# Altium PCB PCB.PcbDoc
Units mm, origin at the board's own origin, x right, y up, seen from the top; angles counter-clockwise.
Board outline 33.85 x 18.99 mm, 2 copper layers (Top Layer, Bottom Layer); 33 components, 25 nets, 134 pads, 55 vias.
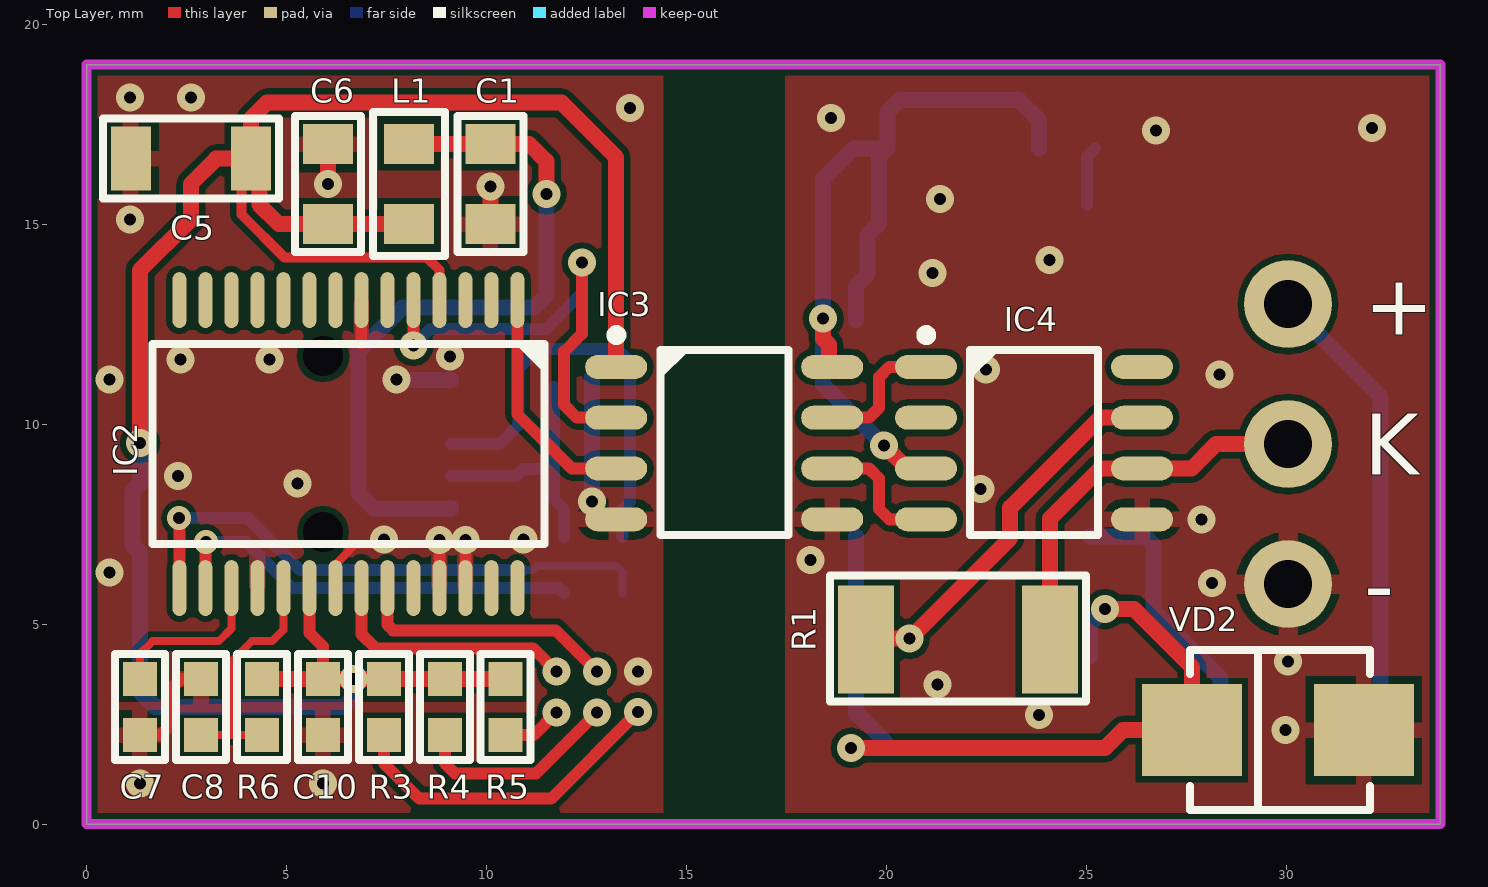
[diagram p0: Top Layer view]
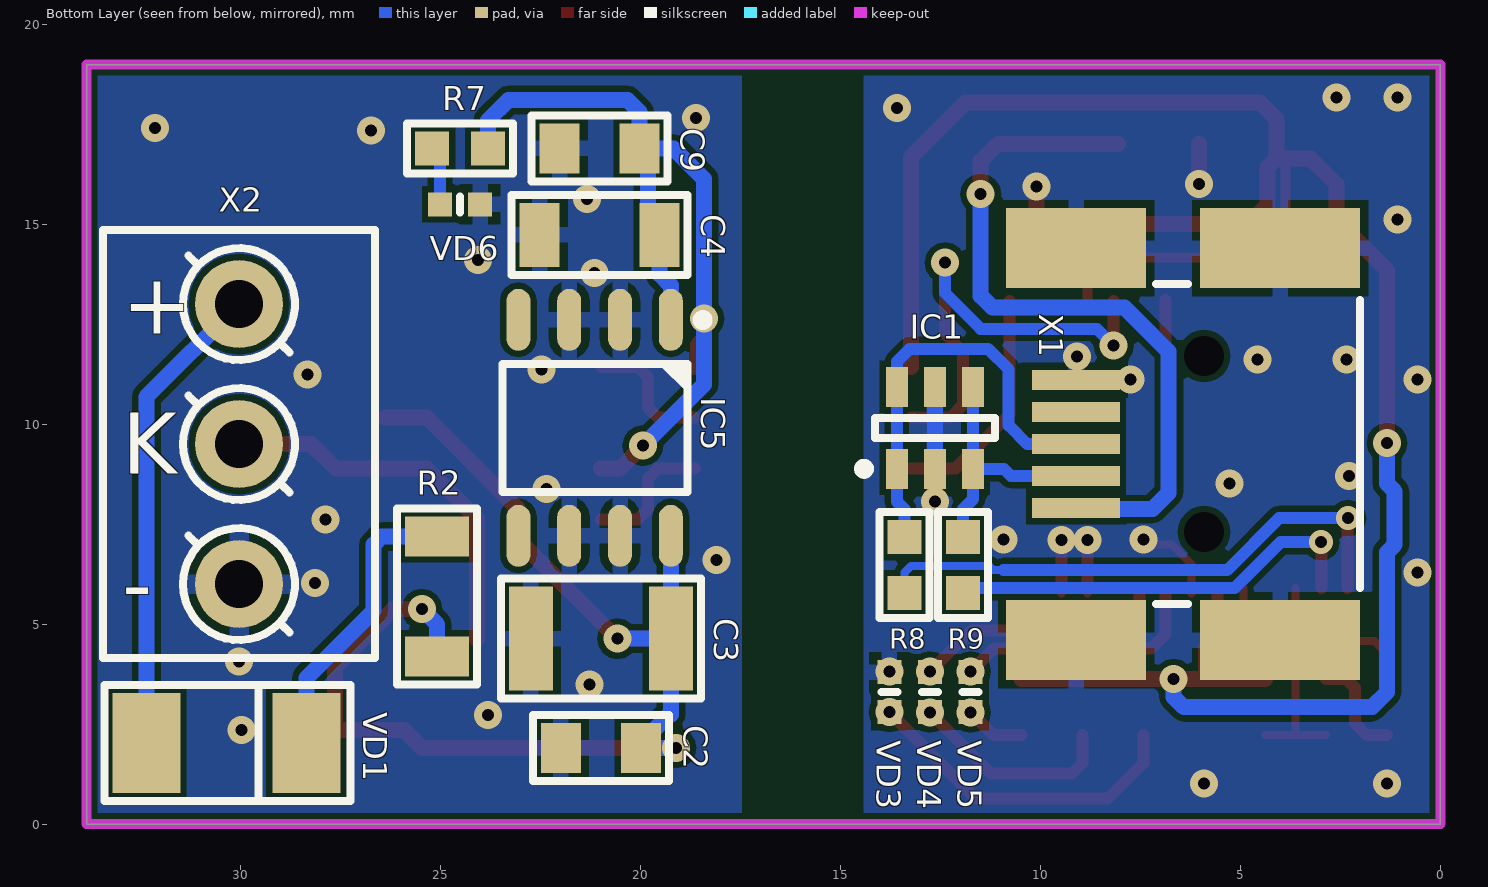
[diagram p1: Bottom Layer view, seen from below]
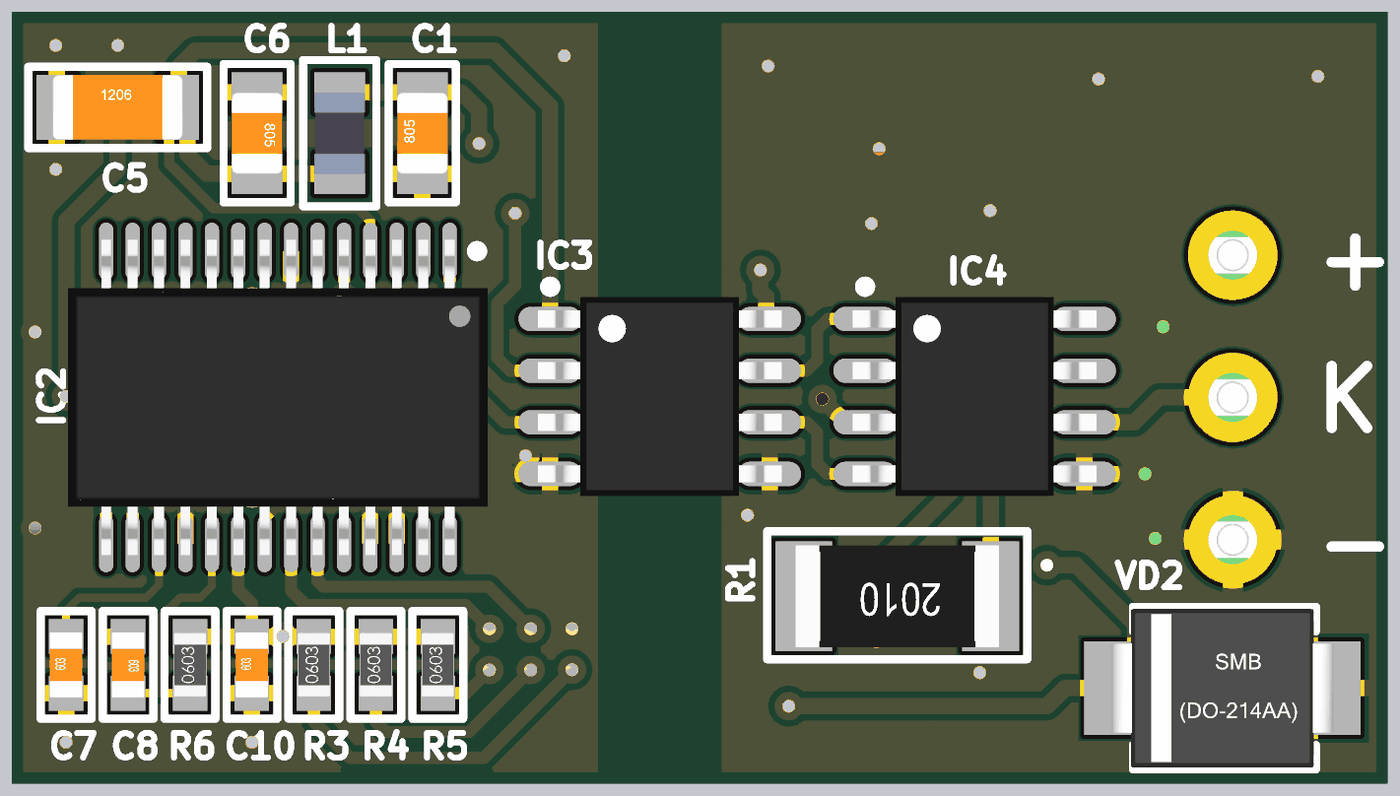
[diagram p2: 3D render of the assembled board from above, using the file's embedded part models]
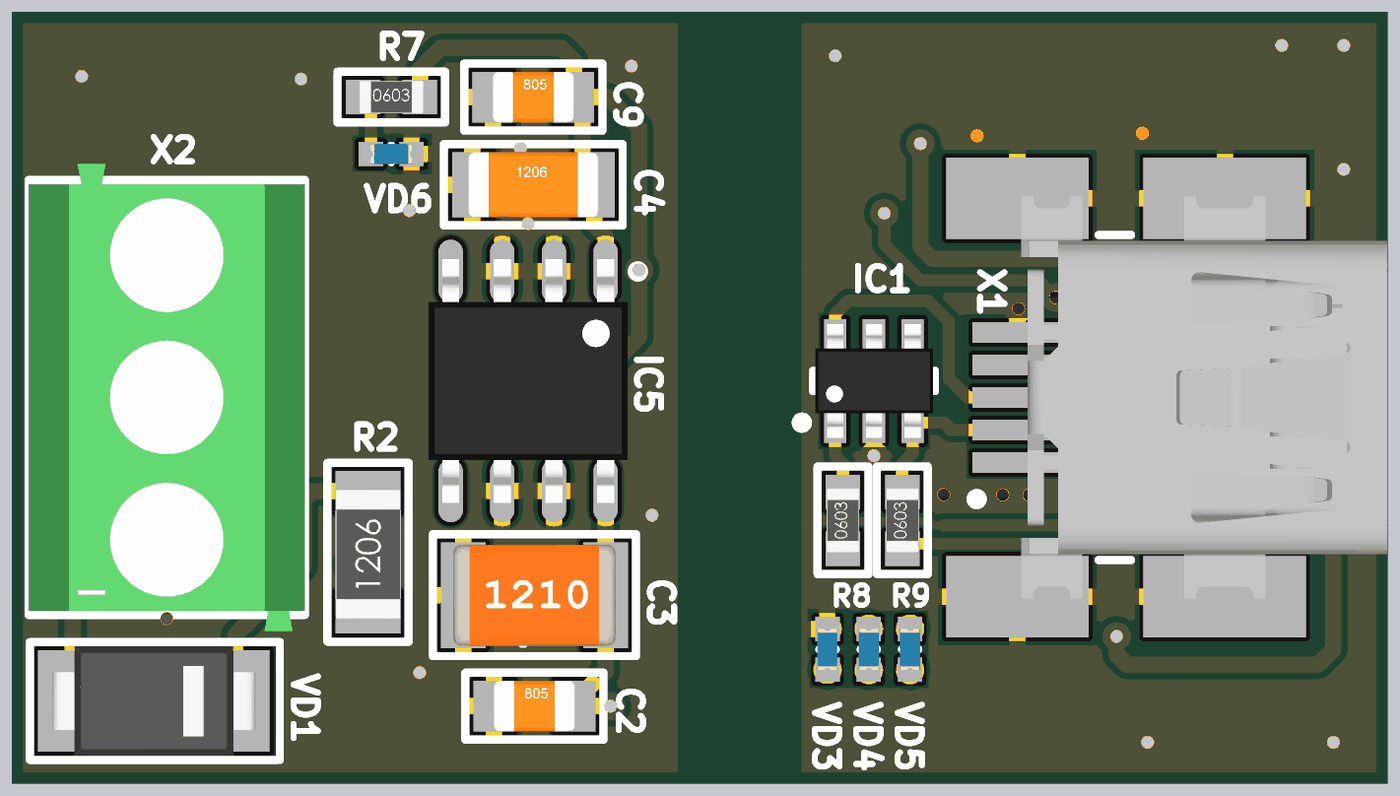
[diagram p3: 3D render of the assembled board from below, using the file's embedded part models]

## Layer stack, top to bottom
Top Solder: solder mask 0.0102, Solder Resist, Dk 3.5
Top Layer: signal copper 0.0356
Dielectric 1: dielectric 0.32, FR-4, Dk 4.8
Bottom Layer: signal copper 0.0356
Bottom Solder: solder mask 0.0102, Solder Resist, Dk 3.5

## Board outline
0,0 33.845,0 33.845,18.986 0,18.986

## Design rules (kind name [scope] priority, off if disabled: settings)
BoardOutlineClearance [All] p1: gap=0.25 ignorepadtopadclearanceinfootprint=FALSE except(0.2: Arc-OutlineEdge Arc-CavityEdge Arc-CutoutEdge Arc-SplitBarrior Arc-SplitContinuation Track-OutlineEdge Track-CavityEdge Track-CutoutEdge Track-SplitBarrior Track-SplitContinuation Region-OutlineEdge Region-CavityEdge Region-CutoutEdge Region-SplitBarrior Region-SplitContinuation Text-OutlineEdge Text-CavityEdge Text-CutoutEdge Text-SplitBarrior Text-SplitContinuation)
Clearance Clearance_1 [InPolygon] p1: gap=0.15 ignorepadtopadclearanceinfootprint=FALSE
Clearance [All] p2: gap=0.15 ignorepadtopadclearanceinfootprint=FALSE
HoleSize [All] p1: absolutevalues=TRUE maxlimit=2.54 minlimit=0.3 maxpercent=80.000 minpercent=20.000
HoleToHoleClearance [All] p1: gap=0.2 allowstackedmicrovias=TRUE
MinimumAnnularRing [All] p1: minimumring=0.2
MinimumSolderMaskSliver [All] p1: minsoldermaskwidth=0.05
PolygonConnect PolygonConnect_1 [IsVia] p1: connectstyle=Direct reliefconductorwidth=0.254 reliefentries=4 polygonreliefangle="90 Angle" airgapwidth=0.254
PolygonConnect [All] p2: thpad.connectstyle=Relief thpad.reliefconductorwidth=0.5 thpad.reliefentries=4 thpad.polygonreliefangle="90 Angle" thpad.airgapwidth=0.2 smdpad.connectstyle=Relief smdpad.reliefconductorwidth=0.4 smdpad.reliefentries=4 smdpad.polygonreliefangle="90 Angle" smdpad.airgapwidth=0.2 via.connectstyle=Relief via.reliefconductorwidth=0.254 via.reliefentries=4 via.polygonreliefangle="45 Angle" via.airgapwidth=0.254
RoutingVias [All] p1: holewidth=0.3 width=0.6 viastyle="Through Hole" minholewidth=0.3 minwidth=0.6 maxholewidth=0.3 maxwidth=0.6
SilkToSilkClearance [All] p1: silktosilkclearance=0.05
SilkToSolderMaskClearance [IsPad] p1: minsilkscreentomaskgap=0.05 clearancetoexposedcopper=TRUE
SolderMaskExpansion [All] p1: expansion=0.102
UnRoutedNet [All] p1: checkbadconnections=TRUE
UnpouredPolygon [All] p1: allowunpoured=TRUE
Width [All] p1: maxlimit=2 minlimit=0.125 preferedwidth=0.15 minimp=50.000000 maximp=50.000000 favimp=50.000000
23 further rules are at their usual default settings.

## Components (designator, comment, footprint, x,y, rotation, side; value= is the part's Value field where it differs from the comment)
C1 "Ceramic capacitor, 0.1μF, X7R, ±10%, 16V, 0805, -55...+125°C" "CAP: 0805" 10.096,16.002 r90 top value=0.1?F
C2 "Ceramic capacitor, 0.1μF, X7R, ±10%, 16V, 0805, -55...+125°C" "CAP: 0805" 20.991,1.905 r180 bottom value=0.1?F
C3 "Ceramic capacitor, 10μF, X7R, ±10%, 50V, 1210, -55...+125°C" "CAP: 1210" 20.991,4.635 r180 bottom value=10?F
C4 "Ceramic capacitor, 4.7μF, X7R, ±10%, 50V, 1206, -55...+125°C" "CAP: 1206" 21.018,14.732 r180 bottom value=4.7?F
C5 "Ceramic capacitor, 4.7μF, X7R, ±10%, 50V, 1206, -55...+125°C" "CAP: 1206" 2.603,16.637 r0 top value=4.7?F
C6 "Ceramic capacitor, 0.1μF, X7R, ±10%, 16V, 0805, -55...+125°C" "CAP: 0805" 6.032,16.002 r270 top value=0.1?F
C7 "Ceramic capacitor, 0.1μF, X7R, ±10%, 16V, 0603, -55...+125°C" "CAP: 0603" 1.333,2.921 r90 top value=0.1?F
C8 "Ceramic capacitor, 0.1μF, X7R, ±10%, 16V, 0603, -55...+125°C" "CAP: 0603" 2.857,2.921 r270 top value=0.1?F
C9 "Ceramic capacitor, 0.1μF, X7R, ±10%, 16V, 0805, -55...+125°C" "CAP: 0805" 21.018,16.891 r180 bottom value=0.1?F
C10 "Ceramic capacitor, 0.1μF, X7R, ±10%, 16V, 0805, -55...+125°C" "CAP: 0603" 5.905,2.921 r90 top value=0.1?F
IC1 "SN65220DBVR" SOT23-6 12.636,9.906 r90 bottom
IC2 "FT232RL" 28-SSOP 6.545,9.5 r270 top locked
IC3 "IC digital isolator, 100Mbps, 3000Vrms, 2.25...5.5V, -55...+125°C, 8-SOIC" 8-SOIC 15.938,9.525 r0 top locked
IC4 "Si9243" 8-SOIC 23.685,9.525 r0 top locked
IC5 "LM2936-5.0" 8-SOIC 21.145,9.906 r270 bottom locked
L1 "Fixed inductor, 47μH, ±20%, 0805, 100mA, -55...+125°C" "IND: 0805" 8.064,16.002 r90 top value=47?H
R1 "Resistor film, 510R, ±5%, 2010, 0.75W, -55...+125°C" "RES: 2010" 21.78,4.611 r180 top locked value=510R
R2 "Resistor film, 10R, ±5%, 1206, 0.25W, -55...+125°C" "RES: 1206" 25.082,5.691 r90 bottom value=10R
R3 "Resistor film, 270R, ±5%, 0603, 0.1W, -55...+125°C" "RES: 0603" 7.429,2.921 r90 top value=270R
R4 "Resistor film, 270R, ±5%, 0603, 0.1W, -55...+125°C" "RES: 0603" 8.954,2.921 r90 top value=270R
R5 "Resistor film, 270R, ±5%, 0603, 0.1W, -55...+125°C" "RES: 0603" 10.477,2.921 r90 top value=270R
R6 "Resistor film, 10K, ±5%, 0603, 0.1W, -55...+125°C" "RES: 0603" 4.381,2.921 r90 top value=10K
R7 "Resistor film, 270R, ±5%, 0603, 0.1W, -55...+125°C" "RES: 0603" 24.511,16.891 r180 bottom value=270R
R8 "Resistor film, 22R, ±5%, 0603, 0.1W, -55...+125°C" "RES: 0603" 13.399,6.477 r90 bottom value=22R
R9 "Resistor film, 22R, ±5%, 0603, 0.1W, -55...+125°C" "RES: 0603" 11.938,6.477 r90 bottom value=22R
VD1 "Single diode, 75V, 150mA, 1V, 4ns, SOD-323, -55...+150°C" "DIODE: SMA" 30.353,2.032 r180 bottom
VD2 "Zener diode, 18V, 500mW, 0.9V, 17Ohm, SOD-123, -55...+150°C" "DIODE: SMB" 29.781,2.349 r180 top locked
VD3 "LED, *, *, *, -55...+150°C" "LED: 0402B" 13.779,3.302 r90 bottom
VD4 "LED, *, *, *, -55...+150°C" "LED: 0402B" 12.763,3.302 r90 bottom
VD5 "LED, *, *, *, -55...+150°C" "LED: 0402B" 11.747,3.302 r90 bottom
VD6 "LED, *, *, *, -55...+150°C" "LED: 0402B" 24.511,15.494 r180 bottom
X1 "USB mini B" "CON: 0675031020" 9.109,9.5 r0 bottom locked
X2 "Terminal connector, 3pin, 3.5mm, 300VAC, 10A" "CON: DG350-3.5-03P" 30.035,9.5 r270 bottom locked

## Footprints (in the part's own frame and the unit in brackets; to place one, negate y for a bottom-side part, rotate by r counter-clockwise, add the part's x,y. Pads: shape width x height; smd on the part's side, far side on the other; paste and mask are expansions set on the pad)
8-SOIC [mm] "pitch 1.27 mm"
  rrect100% 1.55x0.6 smd: 1(-2.7,1.905) 2(-2.7,0.635) 3(-2.7,-0.635) 4(-2.7,-1.905) 5(2.7,-1.905) 6(2.7,-0.635) 7(2.7,0.635) 8(2.7,1.905)
  round 0.7 on Mech1: 28(-2.395,1.8)
  silkscreen extent -2.82,-2.3 1.61,2.82, body extent -3,-2.45 3,2.45, height 1.75
28-SSOP [mm] "pitch 0.65 mm"
  rrect100% 1.4x0.35 smd: 1(-3.6,4.225) 2(-3.6,3.575) 3(-3.6,2.925) 4(-3.6,2.275) 5(-3.6,1.625) 6(-3.6,0.975) 7(-3.6,0.325) 8(-3.6,-0.325) 9(-3.6,-0.975) 10(-3.6,-1.625) 11(-3.6,-2.275) 12(-3.6,-2.925) 13(-3.6,-3.575) 14(-3.6,-4.225) 15(3.6,-4.225) 16(3.6,-3.575) 17(3.6,-2.925) 18(3.6,-2.275) 19(3.6,-1.625) 20(3.6,-0.975) 21(3.6,-0.325) 22(3.6,0.325) 23(3.6,0.975) 24(3.6,1.625) 25(3.6,2.275) 26(3.6,2.925) 27(3.6,3.575) 28(3.6,4.225)
  round 0.5 on Top Overlay: ""(-3.6,4.9)
  round 0.5 on Mech1: ""(-3.4,4.6)
  silkscreen extent -2.5,-4.9 2.5,4.9, body extent -3.88,-5.16 3.88,5.17, height 2.15
"CAP: 0603" [mm]
  rect 0.85x0.85 smd: 1(-0.7,0) 2(0.7,0)
  silkscreen extent -1.33,-0.62 1.33,0.62, body extent -0.8,-0.4 0.8,0.4, height 0.3
"CAP: 0805" [mm]
  rect 1x1.25 smd: 1(-1,0) 2(1,0)
  silkscreen extent -1.7,-0.82 1.7,0.82, body extent -1,-0.62 1,0.63, height 0.78
"CAP: 1206" [mm]
  rect 1x1.6 smd: 1(-1.5,0) 2(1.5,0)
  silkscreen extent -2.2,-1 2.2,1, body extent -1.6,-0.8 1.6,0.8, height 1
"CAP: 1210" [mm]
  rect 1.1x2.6 smd: 1(-1.75,0) 2(1.75,0)
  silkscreen extent -2.5,-1.5 2.5,1.5, body extent -2,-1.24 2,1.24, height 1.7
"CON: 0675031020" [mm]
  rect 4x2 smd: 0(-5.1,-4.9) 0(-5.1,4.9)
  rect 3.5x2 smd: 0(0,-4.9) 0(0,4.9)
  rect 2.2x0.5 smd: 1(0,1.6) 2(0,0.8) 3(0,0) 4(0,-0.8) 5(0,-1.6)
  round 0 hole 1: ""(-3.2,-2.2) ""(-3.2,2.2)
  round 0.5 on Mech1: ""(-0.6,4.5)
  round 0.5 on Bottom Overlay: ""(1,2.5)
  silkscreen extent -7.1,-4 -2,4, body extent -9.1,-4.95 -0.1,4.95, height 3.95
"CON: DG350-3.5-03P" [mm]
  round 2.2 hole 1.2: 1(-3.5,0) 2(0,0) 3(3.5,0)
  round 0.5 on Bottom Overlay: ""(-4.85,-2.9)
  silkscreen extent -5.35,-3.4 5.35,3.4, body extent -5.75,-3.4 5.75,3.4, height 8.4
"DIODE: SMA" [mm]
  rect 1.7x2.5 smd: 1(-2,0) 2(2,0)
  round 0.5 on Mech1: ""(2,0.9)
  silkscreen extent -3.05,-1.45 3.1,1.45, body extent -2.5,-1.35 2.5,1.35, height 2.28
"DIODE: SMB" [mm]
  rect 2.5x2.3 smd: 1(-2.15,0) 2(2.15,0)
  silkscreen extent -2.3,-2 2.2,2, body extent -2.75,-1.95 2.75,1.95, height 2.45
"IND: 0805" [mm]
  rect 1x1.25 smd: 1(-1,0) 2(1,0)
  silkscreen extent -1.8,-0.9 1.8,0.9, body extent -1,-0.62 1,0.63, height 0.85
"LED: 0402B" [mm]
  rect 0.6x0.6 smd: 1(-0.5,0) 2(0.5,0)
  silkscreen extent 0,-0.2 0,0.2, body extent -0.5,-0.25 0.51,0.25, height 0.45
"RES: 0603" [mm]
  rect 0.85x0.85 smd: 1(-0.7,0) 2(0.7,0)
  silkscreen extent -1.33,-0.62 1.33,0.62, body extent -0.8,-0.4 0.8,0.4, height 0.44
"RES: 1206" [mm]
  rect 1x1.6 smd: 1(-1.5,0) 2(1.5,0)
  silkscreen extent -2.2,-1 2.2,1, body extent -1.65,-0.8 1.55,0.8, height 0.47
"RES: 2010" [mm]
  rect 1.4x2.7 smd: 1(-2.3,0) 2(2.3,0)
  silkscreen extent -3.2,-1.6 3.2,1.55, body extent -2.5,-1.25 2.5,1.25, height 0.6
SOT23-6 [mm] "pitch 0.95 mm"
  rect 1x0.55 smd: 1(-1.025,0.95) 2(-1.025,0) 3(-1.025,-0.95) 4(1.025,-0.95) 5(1.025,0) 6(1.025,0.95)
  round 0.5 on Mech1: ""(-0.8,1)
  silkscreen extent -1.15,-1.5 0.25,1.9, body extent -1.4,-1.45 1.4,1.45, height 1.45

## Part data
C1 C2 C6 C9 C10: library part Ceramic_0805, Manufacturer=Yageo, Package=0805, PartNumber=CC0805KRX7R7BB104, Temperature=-55...+125°C, Tolerance=±10%, TypeCapacitor="Ceramic capacitor", TypeDielectric=X7R, ValueManufacturerPartNumber="Ceramic capacitor, 0.1?F, X7R, ±10%, 16V, 0805, -55...+125°C", Voltage=16V, HelpURL=https://www.digikey.com/product-detail/en/yageo/CC0805KRX7R7BB104/311-1142-1-ND/303052
C3: library part Ceramic_1210, Manufacturer=Yageo, Package=1210, PartNumber=CC1210KKX7R9BB104, Temperature=-55...+125°C, Tolerance=±10%, TypeCapacitor="Ceramic capacitor", TypeDielectric=X7R, ValueManufacturerPartNumber="Ceramic capacitor, 10?F, X7R, ±10%, 50V, 1210, -55...+125°C", Voltage=50V, HelpURL=https://www.digikey.com/product-detail/en/yageo/CC1210KKX7R9BB104/311-4522-1-ND/8025611
C4 C5: library part Ceramic_1206, Manufacturer=Yageo, Package=1206, PartNumber=CC1206KRX7R9BB104, Temperature=-55...+125°C, Tolerance=±10%, TypeCapacitor="Ceramic capacitor", TypeDielectric=X7R, ValueManufacturerPartNumber="Ceramic capacitor, 4.7?F, X7R, ±10%, 50V, 1206, -55...+125°C", Voltage=50V, HelpURL=https://www.digikey.com/product-detail/en/yageo/CC1206KRX7R9BB104/311-1179-1-ND/303089
C7 C8: library part Ceramic_0603, Manufacturer=Yageo, Package=0603, PartNumber=CC0603KRX7R7BB104, Temperature=-55...+125°C, Tolerance=±10%, TypeCapacitor="Ceramic capacitor", TypeDielectric=X7R, ValueManufacturerPartNumber="Ceramic capacitor, 0.1?F, X7R, ±10%, 16V, 0603, -55...+125°C", Voltage=16V, HelpURL=https://www.digikey.com/product-detail/en/yageo/CC0603KRX7R7BB104/311-1088-1-ND/302998
IC1: "IC SINGLE USB PORT TVS SOT-23-6", Package="SOT-23-6 Texas Instruments", Availability=Unavailable, MF="Texas Instruments", MP=SN65220DBVR, Price=None, SnapEDA_Link=https://www.snapeda.com/parts/SN65220DBVR/Texas%20Instruments/view-part/214591/?ref=snap
IC2: "USB e??e", Package="SSOP-28 FTDI, Future", Availability=Unavailable, MF="FTDI, Future", MP=FT232RL, Price=None, SnapEDA_Link=https://www.snapeda.com/parts/FT232RL/FTDI%2C%20Future%20Technology%20Devices%20International%20Ltd/view-part/1077088/?ref=snap
IC3: library part ISO7721DR, "Digital isolator", Manufacturer="Texas Instruments", Package=8-SOIC, Temperature=-55...+125°C, ComponentType="IC digital isolator", DataRate=100Mbps, HelpURL=https://www.digikey.com/product-detail/en/texas-instruments/ISO7721DR/296-48296-1-ND/8347715, Isolation=3000Vrms, PartNumber=ISO7721DR, Supply=2.25...5.5V, ValueManufacturerPartNumber="IC digital isolator, 100Mbps, 3000Vrms, 2.25...5.5V, -55...+125°C, 8-SOIC"
L1: library part Inductor_0805, Manufacturer="Murata Electronics", MaxCurrent=100mA, Package=0805, PartNumber=LQM21FN100M70L, Temperature=-55...+125°C, Tolerance=±20%, TypeInductor="Fixed inductor", ValueManufacturerPartNumber="Fixed inductor, 47?H, ±20%, 0805, 100mA, -55...+125°C", HelpURL=https://www.digikey.com/product-detail/en/murata-electronics-north-america/LQM21FN100M70L/490-4029-1-ND/1016289
R1: library part Resistor_2010, Manufacturer=Yageo, Package=2010, PartNumber=RC2010JK-07100RL, Power=0.75W, Temperature=-55...+125°C, Tolerance=±5%, TypeResistor="Resistor film", HelpURL=https://www.digikey.com/product-detail/en/yageo/RC2010JK-07100RL/YAG3381CT-ND/5962203, ValueManufacturerPartNumber="Resistor film, 510R, ±5%, 2010, 0.75W, -55...+125°C"
R2: library part Resistor_1206, Manufacturer=Yageo, Package=1206, PartNumber=RC1206JR-07100RL, Power=0.25W, Temperature=-55...+125°C, Tolerance=±5%, TypeResistor="Resistor film", HelpURL=https://www.digikey.com/product-detail/en/yageo/RC1206JR-07100RL/311-100ERCT-ND/732153, ValueManufacturerPartNumber="Resistor film, 10R, ±5%, 1206, 0.25W, -55...+125°C"
R3 R4 R5 R6 R7 R8 R9: library part Resistor_0603, Manufacturer=Yageo, Package=0603, PartNumber=RC0603JR-07100RL, Power=0.1W, Temperature=-55...+125°C, Tolerance=±5%, TypeResistor="Resistor film", HelpURL=https://www.digikey.com/product-detail/en/yageo/RC0603JR-07100RL/311-100GRCT-ND/729644
  R3 R4 R5 R7: ValueManufacturerPartNumber="Resistor film, 270R, ±5%, 0603, 0.1W, -55...+125°C"
  R6: ValueManufacturerPartNumber="Resistor film, 10K, ±5%, 0603, 0.1W, -55...+125°C"
  R8 R9: ValueManufacturerPartNumber="Resistor film, 22R, ±5%, 0603, 0.1W, -55...+125°C"
VD1: library part Diode_single, Current=150mA, Manufacturer="Micro Commercial", Package=SOD-323, PartNumber=GS1M, Temperature=-55...+150°C, Voltage=75V, VoltageDrop=1V, HelpURL=https://www.digikey.com/product-detail/en/micro-commercial-co/1N4148WX-TP/1N4148WXTPMSCT-ND/717312, RecoveryTime=4ns, TypeDiode="Single diode", ValueManufacturerPartNumber="Single diode, 75V, 150mA, 1V, 4ns, SOD-323, -55...+150°C"
VD2: library part TVS_single, Current=500mW, Manufacturer="Diodes Incorporated", Package=SOD-123, PartNumber=SMBJ18A, Temperature=-55...+150°C, Voltage=18V, VoltageDrop=0.9V, HelpURL=https://www.digikey.com/product-detail/en/diodes-incorporated/MMSZ5231B-7-F/MMSZ5231B-FDICT-ND/755506, RecoveryTime=17Ohm, TypeDiode="Zener diode", ValueManufacturerPartNumber="Zener diode, 18V, 500mW, 0.9V, 17Ohm, SOD-123, -55...+150°C"
VD3 VD6: library part LED_single, Color=RED, Temperature=-55...+150°C, TypeDiode=LED, ValueManufacturerPartNumber="LED, *, *, *, -55...+150°C"
VD4: library part LED_single, Color=GREEN, Temperature=-55...+150°C, TypeDiode=LED, ValueManufacturerPartNumber="LED, *, *, *, -55...+150°C"
VD5: library part LED_single, Color=BLUE, Temperature=-55...+150°C, TypeDiode=LED, ValueManufacturerPartNumber="LED, *, *, *, -55...+150°C"
X1: library part Connector_USB_mini_B, Manufacturer=Molex, PartNumber=0675031020, CommentText="\"USB\"", HelpURL=https://www.digikey.com/product-detail/en/molex/0675031020/WM5461CT-ND/1624427, TypeConnector="USB mini B", ValueManufacturerPartNumber="USB mini B"
X2: library part Connector_terminal_3pin, CurrentMax=10A, Manufacturer=Degson, PartNumber=DG350-3.5-03P-14, VoltageMax=300VAC, CommentText="\"Ðàçúåì\"", HelpURL=https://www.chipdip.ru/product/dg350-3.5-03p-12, Multichannel=3pin, Pitch=3.5mm, TypeConnector="Terminal connector", ValueManufacturerPartNumber="Terminal connector, 3pin, 3.5mm, 300VAC, 10A"

## Via types
v1: diameter 0.7, hole 0.3, Top Layer to Bottom Layer, tented both sides, 53 vias
v2: diameter 0.6, hole 0.3, Top Layer to Bottom Layer, tented both sides, 2 vias

## Nets (pads, with @x,y where several pads share a name; then routed paths per layer and width w, separated by ;. In a path a pad name is that pad's centre, name@x,y a point inside that pad or via, vN(x,y) a via of type N, cw(c..) or ccw(c..) an arc to the next point about the centre after c; other vN are vias at no path point)
3V3: C7.2 IC2.17 | length 4.2
  Top Layer w0.2: C7.2 1.333,4.255 1.651,4.572 3.302,4.572 3.619,4.889 IC2.17
+5: C4.2 C9.2 IC3.8 IC4.3 IC5.1 R7.2 | length 22.2
  Top Layer w0.4: v1(18.415,12.636) 18.415,12.128 18.565,11.979 18.565,11.43 IC3.8 ; v1(19.939,9.461) 20.51,8.89 IC4.3
  Bottom Layer w0.4: IC5.1 19.241,13.462 19.518,13.74 C4.2 19.812,15.026 19.812,16.684 C9.2 ; v1(19.939,9.461) 18.415,10.986 v1(18.415,12.636) 18.415,16.129 19.177,16.891 C9.2 ; R7.2 23.811,17.591 23.304,18.098 20.32,18.098 20.019,17.796 C9.2
+5_USB: C5.2 C6.2 C10.2 IC2.4 IC2.20 IC3.1 L1.1 R3.2 R4.2 R5.2 R6.2 | length 58.8
  Top Layer w0.2: C5.2@3.873,16.407 C5.2
  Top Layer w0.25: C5.2@3.873,16.407 3.873,15.24 4.953,14.16 8.509,14.16 8.819,13.85 IC2.4
  Top Layer w0.3: IC2.20 5.57,4.781 5.905,4.445 C10.2
  Top Layer w0.4: v1(1.333,9.525) 1.333,13.843 2.603,15.113 2.603,16.002 3.238,16.637 C5.2 ; R6.2 C10.2 v1(6.668,3.621) R3.2 R4.2 R5.2 ; L1.1 C6.2 4.804,15.002 4.318,15.488 4.318,16.423 C5.2 ; IC3.1 13.238,16.67 11.874,18.034 4.508,18.034 4.104,17.629 C5.2
  Bottom Layer w0.4: v1(1.333,9.525) 1.333,8.509 1.143,8.319 1.143,6.985 1.333,6.794 1.333,3.302 1.714,2.921 6.413,2.921 6.668,3.175 v1(6.668,3.621)
+12: C2.2 C3.2 IC4.7 IC5.8 R1.2 R2.1 VD2.2 | length 31.9
  Top Layer w0.4: v1(19.113,1.905) 25.463,1.905 25.908,2.349 VD2.2 27.631,3.928 26.186,5.374 v1(25.463,5.374) ; R1.2@19.48,4.635 v1(20.574,4.635) 23.09,7.151 23.09,7.913 25.336,10.16 IC4.7
  Bottom Layer w0.4: v1(19.113,1.905) C2.2 19.991,2.03 19.285,2.736 19.241,2.736 C3.2 ; IC5.8 C3.2 ; v1(20.574,4.635) C3.2 ; R2.1 25.082,4.993 v1(25.463,5.374)
D+: IC1.1 IC1.6 R8.2 X1.3 | length 10.9
  Bottom Layer w0.3: X1.3 10.325,9.5 10.795,9.97 10.795,11.367 11.305,11.877 13.269,11.877 13.587,11.559 IC1.6 IC1.1 13.587,8.062 13.399,7.874 R8.2
D-: IC1.3 IC1.4 R9.2 X1.2 | length 6.5
  Bottom Layer w0.3: X1.2 10.732,8.7 10.913,8.881 IC1.3 ; IC1.4 IC1.3 ; R9.2 11.938,7.874 11.687,8.125 IC1.3
GND: C2.1 C3.1 C4.1 C9.1 IC3.5 IC4.5 IC5.2 IC5.3 IC5.6 IC5.7 VD2.1 VD6.2 X2.3
  other v1: 29.972,2.349 23.812,2.73 21.273,3.492 30.035,4.064 28.13,6.032 18.098,6.604 27.877,7.62 22.352,8.382 28.321,11.239 22.479,11.367 21.145,13.779 24.066,14.097 21.336,15.621 26.733,17.335 32.131,17.399 18.605,17.653
GND_USB: C1.1 C5.1 C6.1 C7.1 C8.1 C10.1 IC1.2 IC1.5 IC2.7 IC2.18 IC2.21 IC2.25 IC2.26 IC3.4 VD3.2 X1.0 X1.5 | length 14.9
  Top Layer w0.2: IC2.21@6.219,5.769 6.219,6.492 6.712,6.985 v1@7.302,6.985 ; IC2.25@8.819,5.769 IC2.25 ; IC2.26@9.47,5.769 IC2.26 ; C1.1 10.16,15.066 C1.1@10.096,15.129
  Top Layer w0.3: C7.1 1.84,2.221 2.133,2.514 2.133,3.403 2.351,3.621 C8.1 ; 6.87,12.013 IC2.7 ; v1(8.819,7.105) IC2.25 ; IC2.26 v1(9.47,7.104)
  Top Layer w0.4: v1(6.032,16.002) C6.1 ; C1.1@10.096,15.129 v1(10.096,15.938)
  Bottom Layer w0.3: VD3.2 v1(13.779,3.81)
  Bottom Layer w0.4: v1(7.747,11.112) 7.753,11.106 9.103,11.106 X1.5 ; v1(12.636,8.064) 12.636,8.651 IC1.5@12.636,11.161
  other v1: 1.333,1.016 5.905,1.016 0.572,6.286 7.429,7.112 10.922,7.112 5.271,8.509 2.286,8.7 0.572,11.112 2.349,11.62 4.572,11.62 9.08,11.684 1.079,15.113 13.589,17.907 1.079,18.161 2.603,18.161
K-Line: IC4.6 R1.1 X2.2 | length 9.8
  Top Layer w0.4: R1.1 24.081,7.634 25.336,8.89 IC4.6 27.622,8.89 28.232,9.5 X2.2
NetC1_2: C1.2 L1.2 X1.1 | length 18.3
  Top Layer w0.4: L1.2 C1.2 11.065,17.002 11.493,16.573 v1(11.493,15.748)
  Bottom Layer w0.4: X1.1 9.082,7.872 7.203,7.872 6.793,8.283 6.793,11.809 7.9,12.916 11.202,12.916 11.493,13.208 v1(11.493,15.748)
NetIC2_15: IC2.15 R8.1 | length 14
  Top Layer w0.3: IC2.15 v2@2.32,7.648
  Bottom Layer w0.2: 10.924,6.35 11.176,6.35 11.278,6.452 13.233,6.452 13.399,6.286 R8.1
  Bottom Layer w0.3: v2(2.314,7.648) 4.036,7.648 5.334,6.35 10.924,6.35
NetIC2_16: IC2.16 R9.1 | length 10.6
  Top Layer w0.3: IC2.16 2.97,7.034 v2(2.984,7.048)
  Bottom Layer w0.3: v2(2.984,7.048) 3.999,7.048 5.148,5.9 11.815,5.9 R9.1
NetR2_2: R2.2 VD1.2 | length 7.3
  Bottom Layer w0.4: R2.2 26.464,7.191 26.67,6.985 26.67,5.334 28.353,3.651 VD1.2
NetR3_1: R3.1 VD3.1 | length 8.3
  Top Layer w0.3: R3.1 7.429,1.524 8.319,0.635 11.612,0.635 v1(13.779,2.802)
NetR4_1: R4.1 VD4.1 | length 5.3
  Top Layer w0.3: R4.1 8.954,1.524 9.207,1.27 11.239,1.27 v1(12.763,2.794)
  Bottom Layer w0.3: v1(12.763,2.794) VD4.1
NetR5_1: R5.1 VD5.1 | length 1.5
  Top Layer w0.3: R5.1 11.174,2.221 v1(11.747,2.794)
  Bottom Layer w0.3: v1(11.747,2.794) VD5.1
NetR7_1: R7.1 VD6.1 | length 1.5
  Bottom Layer w0.3: VD6.1 25.011,16.691 R7.1
NetVD1_1: VD1.1 X2.1 | length 11.9
  Bottom Layer w0.4: X2.1 32.353,10.683 VD1.1
RST: C8.2 IC2.19 R6.1 | length 6
  Top Layer w0.2: C8.2 3.619,2.221 ; R6.1 3.619,2.221 ; IC2.19 4.92,4.856 4.635,4.572 4.129,4.572 3.619,4.063 3.619,2.221
RX: IC3.7 IC4.1 | length 3.3
  Top Layer w0.3: IC3.7 19.558,10.16 19.812,10.414 19.812,11.176 20.066,11.43 IC4.1
RXD: IC2.5 IC3.2 | length 11.8
  Top Layer w0.3: v1(8.17,11.96) IC2.5@8.17,13.081 ; v1(12.383,14.034) 12.383,12.255 11.938,11.811 11.938,10.477 12.255,10.16 IC3.2
  Bottom Layer w0.3: v1(8.17,11.96) 8.592,12.383 11.493,12.383 12.383,13.271 v1(12.383,14.034)
RXLED: IC2.22 VD5.2 | length 6.4
  Top Layer w0.3: IC2.22 6.87,5.193 6.87,4.751 7.225,4.396 11.162,4.396 v1(11.747,3.81)
  Bottom Layer w0.3: VD5.2 v1(11.747,3.81)
TX: IC3.6 IC4.4 | length 3.3
  Top Layer w0.3: IC3.6 19.558,8.89 19.812,8.636 19.812,7.874 20.066,7.62 IC4.4
TXD: IC2.1 IC3.3 | length 5.9
  Top Layer w0.3: IC2.1@10.769,13.081 10.769,10.249 12.128,8.89 IC3.3
TXLED: IC2.23 VD4.2 | length 6.7
  Top Layer w0.3: IC2.23 7.52,4.99 7.664,4.846 11.728,4.846 v1(12.763,3.81)
  Bottom Layer w0.3: VD4.2 v1(12.763,3.81)
pads on no net: IC1. IC2. IC2.2 IC2.3 IC2.6 IC2.8 IC2.9 IC2.10 IC2.11 IC2.12 IC2.13 IC2.14 IC2.24 IC2.27 IC2.28 IC3.28 IC4.2 IC4.8 IC4.28 IC5.4 IC5.5 IC5.28 VD1. X1. X1.4 X2.

## Polygon pours and split planes (outlines as drawn)
GND on Top Layer "Top Layer-No Net" (solid, remove dead copper, pour order 2): 17.462,18.986 33.846,18.986 33.846,0 17.462,0
GND_USB on Top Layer "Top Layer-No Net 1" (solid, remove dead copper, pour order 0): 0,18.986 14.414,18.986 14.414,0 0,0
GND on Bottom Layer "Top Layer-No Net" (solid, remove dead copper, pour order 6): 17.462,18.986 33.846,18.986 33.846,0 17.462,0
GND_USB on Bottom Layer "Top Layer-No Net 1" (solid, remove dead copper, pour order 4): 0.063,18.986 14.414,18.986 14.414,0 0.063,0

## Keep-outs
Keep-Out Layer:
  the board outline again, w0.254

## Silkscreen, mask and mechanical layers (free items; w line width, h text height)
Top Overlay:
  text "+" at 31.941,12.238 h1.52
  text "K" at 31.941,8.738 h1.52
  text "-" at 31.941,5.238 h1.52
Bottom Overlay:
  text "+" at 32.956,12.256 h1.52
  text "K" at 32.956,8.756 h1.52
  text "-" at 32.956,5.256 h1.52